# Altium PCB Gate_Driver.PcbDoc
Units mm, origin at the board's own origin, x right, y up, seen from the top; angles counter-clockwise.
Board outline 16.5 x 22 mm, 2 copper layers (Top Layer, Bottom Layer); 33 components, 28 nets, 108 pads, 5 vias.
Unrouted connection lines stored in the file: 45.
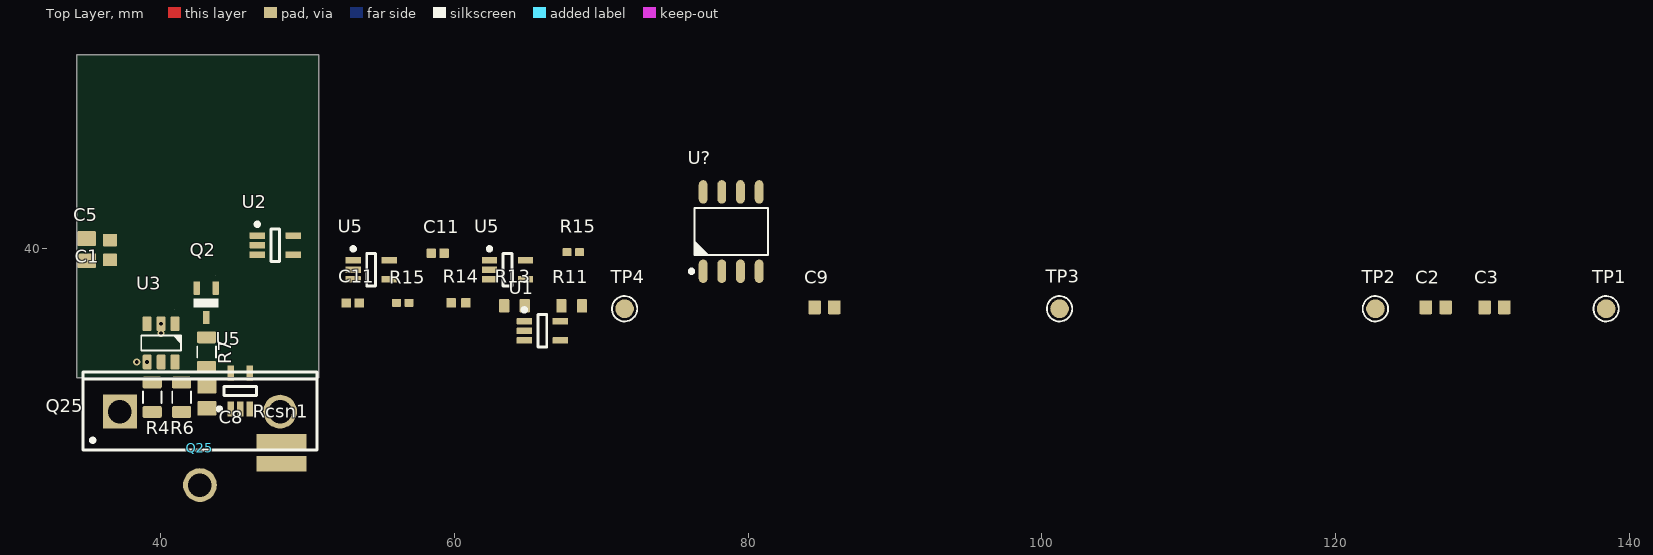
[diagram p0: Top Layer view]
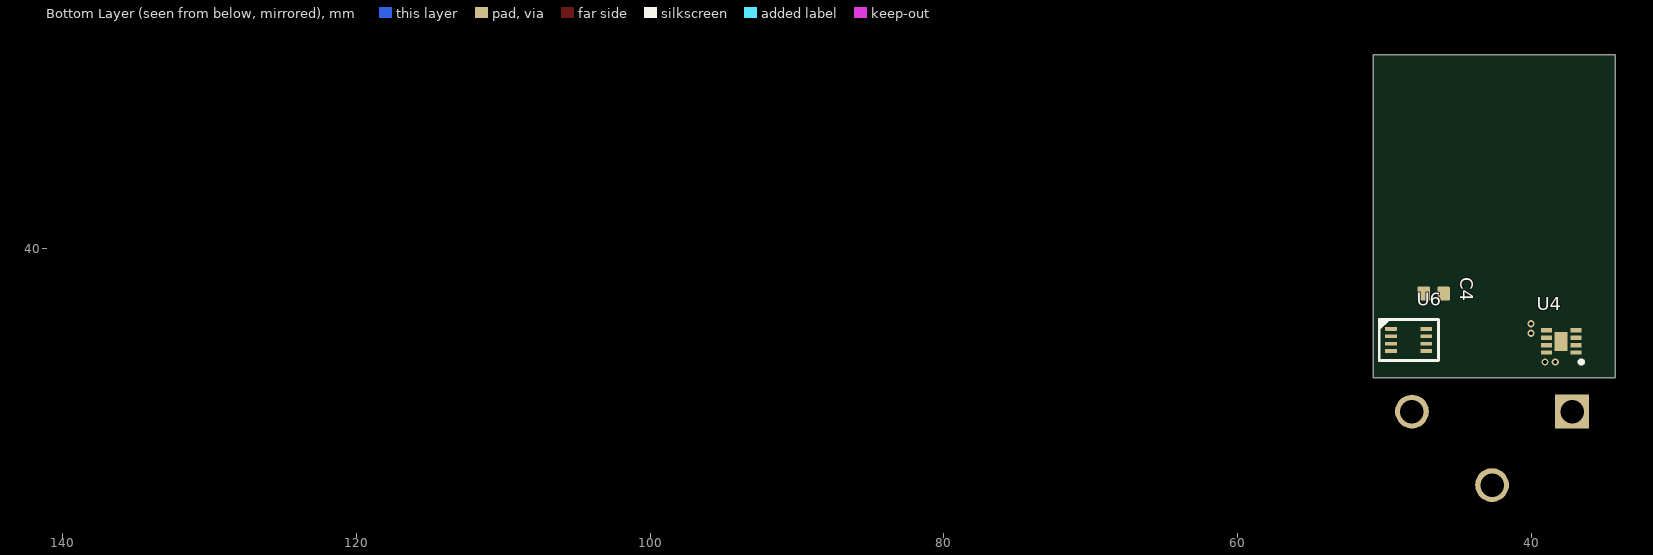
[diagram p1: Bottom Layer view, seen from below]

## Layer stack, top to bottom
Top Solder: solder mask 0.0102, Solder Resist, Dk 3.5
Top Layer: signal copper 0.0356
Dielectric 1: dielectric 0.32, FR-4, Dk 4.8
Bottom Layer: signal copper 0.0356
Bottom Solder: solder mask 0.0102, Solder Resist, Dk 3.5

## Board outline
34.3,31.2 34.3,53.2 50.8,53.2 50.8,31.2

## Design rules (kind name [scope] priority, off if disabled: settings)
Clearance [All] p1: gap=0.14 ignorepadtopadclearanceinfootprint=FALSE
PolygonConnect [All] p1: connectstyle=Relief reliefconductorwidth=0.254 reliefentries=4 polygonreliefangle="90 Angle" airgapwidth=0.254
RoutingVias [All] p1: holewidth=0.711 width=1.27 viastyle="Through Hole" minholewidth=0.711 minwidth=1.27 maxholewidth=0.711 maxwidth=1.27
SolderMaskExpansion [All] p1: expansion=0.102 istentingtop=FALSE
Width [All] p1: maxlimit=0.254 minlimit=0.254 preferedwidth=0.254
30 further rules are at their usual default settings.

## Components (designator, comment, footprint, x,y, rotation, side; value= is the part's Value field where it differs from the comment)
C1 "100nF" CAPC1608X90X35NL10T15 36.575,39.9 r270 top
C2 "100nF" CAPC1608X90X35NL10T15 126.8,36 r0 top
C3 "100nF" CAPC1608X90X35NL10T15 130.8,36 r0 top
C4 "100nF" CAPC1608X90X35NL10T15 46.675,36.925 r0 bottom
C5 "330nF" CAPC2013X135X45LL10T25 34.975,39.925 r270 top
C8 "330nF" CAPC2013X135X45LL10T25 43.175,29.875 r270 top
C9 "100nF" CAPC1608X90X35NL10T15 85.2,36 r0 top
C11 "100pF" CAPC1005X55X25NL05T10 58.878,39.677 r0 top
C11 "100pF" CAPC1005X55X25NL05T10 53.1,36.3 r0 top
Q2 "DMN3067LW-7" SOT323 43.125,36.3 r270 top
Q25 "C3M0065090D" TO-247 42.7,28.9 r0 top
R4 "4.7R" RESC2012X70N 39.45,29.875 r270 top value=N/A
R6 "1R" RESC2012X70N 41.45,29.875 r270 top value=N/A
R7 "6.2R" RESC2012X70N 43.15,32.95 r270 top value=N/A
R11 "330R" RESC1608X55X25NL10T15 68,36.1 r0 top
R13 "10K" RESC1608X55X25NL10T15 64.1,36.1 r0 top
R14 "33K" RESC1005X40X25ML05T05 60.3,36.3 r0 top
R15 "1K" RESC1005X40X25NL05T10 68.103,39.752 r0 top
R15 "1K" RESC1005X40X25NL05T10 56.5,36.3 r0 top
Rcsn1 "0.02R" RESC1632X80N 48.25,26.1 r90 top
TP1 "TESTPOINT" TP-R60 138.4,35.9 r0 top
TP2 "TESTPOINT" TP-R60 122.7,35.9 r0 top
TP3 "TESTPOINT" TP-R60 101.2,35.9 r0 top
TP4 "TESTPOINT" TP-R60 71.6,35.9 r0 top
U1 "74AHC1G08SE-7" DCK0005A_M 66,34.4 r0 top
U2 "SN74AHCT1G126DCKR" DCK0005A_M 47.825,40.225 r0 top
U3 "1EDN8550B" SOT23-6 40.05,33.575 r270 top
U4 "NCP5901BMNTBG" SON50P200X200X100-9N 38,33.675 r0 bottom
U5 "74AHC1G08SE-7" DCK0005A_M 63.628,38.552 r0 top
U5 "74AHC1G08SE-7" DCK0005A_M 54.353,38.552 r0 top
U5 "74AHC1G08SE-7" DCK0005A_M 45.45,30.3 r90 top
U6 "TC7W53FK" SSOP8-P-0.50A 48.375,33.775 r180 bottom
U? "LT1011" SOIC127P600X175-8AN 78.85,41.15 r90 top

## Footprints (in the part's own frame and the unit in brackets; to place one, negate y for a bottom-side part, rotate by r counter-clockwise, add the part's x,y. Pads: shape width x height; smd on the part's side, far side on the other; paste and mask are expansions set on the pad)
CAPC1005X55X25NL05T10 [mm]
  rrect15% 0.66x0.62 smd: 1(-0.44,0) 2(0.44,0)
  body extent -0.53,-0.28 0.53,0.27, height 0.55
CAPC1608X90X35NL10T15 [mm]
  rrect15% 0.85x0.95 smd: 1(-0.675,0) 2(0.675,0)
  body extent -0.85,-0.45 0.85,0.45, height 0.9
CAPC2013X135X45LL10T25 [mm]
  rrect15% 1x1.3 smd: 1(-0.75,0) 2(0.75,0)
  body extent -1.05,-0.67 1.05,0.68, height 1.35
DCK0005A_M [mm]
  rrect22% 1.05x0.45 smd: 1(-1.225,0.65) 2(-1.225,0) 3(-1.225,-0.65) 4(1.225,-0.65) 5(1.225,0.65)
  silkscreen extent -1.35,-1.1 0.3,1.55, body extent -1.14,-1 1.14,1, height 0.94
RESC1005X40X25ML05T05 [mm]
  rrect15% 0.65x0.65 smd: 1(-0.5,0) 2(0.5,0)
  body extent -0.53,-0.28 0.53,0.28, height 0.4
RESC1005X40X25NL05T10 [mm]
  rrect15% 0.6x0.55 smd: 1(-0.425,0) 2(0.425,0)
  body extent -0.53,-0.27 0.53,0.28, height 0.4
RESC1608X55X25NL10T15 [mm]
  rrect15% 0.7x0.9 smd: 1(-0.7,0) 2(0.7,0)
  body extent -0.85,-0.45 0.85,0.45, height 0.55
RESC1632X80N [mm]
  rect 1.05x3.4 smd: 1(-0.75,0) 2(0.75,0)
  body extent -0.8,-1.6 0.8,1.6, height 0.8
RESC2012X70N [mm] "Chip Resistor, Body 2.0x1.2mm, EIA 0805, IPC Medium Density"
  round 0.254 on Mech15: 0(0,0)
  rrect25% 0.8x1.3 smd: 1(-1,0) 2(1,0)
  Top Layer pour cut-out: -0.725,0.65 -0.525,0.85 0.525,0.85 0.725,0.65 0.725,-0.65 0.525,-0.85 -0.525,-0.85 -0.725,-0.65
  silkscreen extent -0.38,-0.64 0.38,0.63, body extent -1.1,-0.67 1.1,0.68, height 0.69
SOIC127P600X175-8AN [mm] "SOIC, 8-Leads, Body 4.9x3.9mm, Pitch 1.27mm, IPC Medium Density"
  round 1 on Mech15: 0(0,0)
  oval 1.6x0.6 smd: 1(-2.7,1.905) 2(-2.7,0.635) 3(-2.7,-0.635) 4(-2.7,-1.905) 5(2.7,-1.905) 6(2.7,-0.635) 7(2.7,0.635) 8(2.7,1.905)
  silkscreen extent -2.82,-2.5 1.6,2.82, body extent -3,-2.45 3,2.45, height 1.75
SON50P200X200X100-9N [mm]
  rect 0.75x0.3 smd: 1(-1,0.75) 2(-1,0.25) 3(-1,-0.25) 4(-1,-0.75) 5(1,-0.75) 6(1,-0.25) 7(1,0.25) 8(1,0.75)
  rect 0.9x1.3 smd: 9(0,0)
  silkscreen extent -1.5,1.28 -1.25,1.52, body extent -1.05,-1 1.05,1, height 1
SOT23-6 [mm]
  round 0.5 on Mech15: 0(0,0)
  rrect25% 1x0.6 smd: 1(-1.3,0.95) 2(-1.3,0) 3(-1.3,-0.95) 4(1.3,-0.95) 5(1.3,0) 6(1.3,0.95)
  silkscreen extent -0.51,-1.35 0.51,1.35, body extent -1.4,-1.45 1.4,1.45, height 1.44
SOT323 [mm] "Small outline 2.1mm L x 1.25mm W x 1.1mm H; 3 lead SC70, EIAJ SC-70, SOT323"
  round 0.5 on Mech15: 0(0,0)
  rrect20% 0.9x0.45 smd: 1(-1,0.65) 2(-1,-0.65) 3(1,0)
  silkscreen extent -0.3,-0.85 0.3,0.85, body extent -1.2,-1.1 1.2,1.1, height 1.1
SSOP8-P-0.50A [mm]
  rrect20% 0.8x0.254 smd: 1(-1.2,0.75) 2(-1.2,0.25) 3(-1.2,-0.25) 4(-1.2,-0.75) 5(1.2,-0.75) 6(1.2,-0.25) 7(1.2,0.25) 8(1.2,0.75)
  silkscreen extent -2.01,-1.4 2.02,1.4, body extent -1.05,-1 1.05,1, height 0.95
TO-247 [mm] "SIP with Mounting Hole; 3 Leads; Body 20 x 15.6 x 5 mm (typ); Pitch 5.45 mm"
  rect 2.3x2.3 hole 1.6: 1(-5.45,0)
  round 2.3 hole 1.6: 2(0,-5) 3(5.45,0)
  silkscreen extent -7.95,-2.6 7.95,2.7, body extent -7.95,-2.6 7.95,2.7, height 24.6
TP-R60 [mm]
  round 1.27 smd paste-1.27: 1(0,0)
  silkscreen extent -0.86,-0.86 0.86,0.86, body extent -0.76,-0.76 0.76,0.76, height 0.25

## Part data
C1 C2 C3 C4 C9: library part CAP, "X7R 100nF ±10% 50V 0603 Multilayer Ceramic Capacitors MLCC - SMD/SMT ROHS", Case Code (Imperial)=0603, Case Code (Metric)=1608, Dielectric=X7R, JLCPCB Part #=C14663, Manufacturer=Murata, Manufacturer Part Number=CC0603KRX7R9BB104, Max Operating Temperature=125°C, Min Operating Temperature=-55°C, Part Number=GCM188R72A104KA64D, Tolerance=10%, Voltage Rating=100V, Capacitance=100nF, Case/Package=0603, Category="Ceramic Capacitors", ComponentLink1Description=https://datasheet.ciiva.com/17451/product-17451047.pdf?src-supplier=Avnet+Europe, ComponentLink1URL=https://datasheet.ciiva.com/17451/product-17451047.pdf?src-supplier=Avnet+Europe, ComponentLink2Description=https://datasheet.ciiva.com/26889/getdatasheetpartid-387765-26889164.pdf?src-supplier=Verical, ComponentLink2URL=https://datasheet.ciiva.com/26889/getdatasheetpartid-387765-26889164.pdf?src-supplier=Verical, Depth=0.8mm, Height=0.8mm, Length=1.6mm, Mount="Surface Mount", Packaging="Tape and Reel", Radiation Hardening=No, RoHS=Yes, Supplier 1="Arrow Electronics", Supplier Part Number 1=GCM188R72A104KA64D, Termination=SMD/SMT, Voltage Rating (DC)=100V
C5 C8: library part CAP-NP-2, "X7R ±10% 50V 330nF 0805 Multilayer Ceramic Capacitors MLCC - SMD/SMT ROHS", Capacitance=100nF, Case Code (Imperial)=0805, Case Code (Metric)=2012, Dielectric=X7R, Dielectric Material=Ceramic, Insulation Resistance=10GR, JLCPCB Part #=C1740, Manufacturer=Murata, Manufacturer Part Number=GRM21BR71H104KA01L, Max Operating Temperature=125degC, Min Operating Temperature=-55degC, Package Description="2-Pin Surface Mount Device, Body 2 x 1.25 mm", Package Quantity=1, Supplier Part Number 1=2408531, Tolerance=10%, Voltage=50V, Case/Package=0805, Category="Ceramic Capacitors", ComponentLink1Description=https://datasheet.ciiva.com/11786/0900766b8003061f-11786305.pdf?src-supplier=RSComponents, ComponentLink1URL=https://datasheet.ciiva.com/11786/0900766b8003061f-11786305.pdf?src-supplier=RSComponents, ComponentLink2Description=https://datasheet.ciiva.com/20173/71-2024-20173169.pdf?src-supplier=Rapid+Electronics, ComponentLink2URL=https://datasheet.ciiva.com/20173/71-2024-20173169.pdf?src-supplier=Rapid+Electronics, ComponentLink3Description=https://datasheet.ciiva.com/29200/453120-da-01-en-vs-kondensator-0805-29200537.pdf?src-supplier=Conrad, ComponentLink3URL=https://datasheet.ciiva.com/29200/453120-da-01-en-vs-kondensator-0805-29200537.pdf?src-supplier=Conrad, ComponentLink4Description=https://datasheet.ciiva.com/132/partnumbering-e-01-132209.pdf?src-supplier=Digi-Key, ComponentLink4URL=https://datasheet.ciiva.com/132/partnumbering-e-01-132209.pdf?src-supplier=Digi-Key, ComponentLink5Description=https://datasheet.ciiva.com/132/partnumbering-e-01-132210.pdf?src-supplier=Digi-Key, ComponentLink5URL=https://datasheet.ciiva.com/132/partnumbering-e-01-132210.pdf?src-supplier=Digi-Key, ComponentLink6Description=https://datasheet.ciiva.com/132/partnumbering-e-01-132211.pdf?src-supplier=Digi-Key, ComponentLink6URL=https://datasheet.ciiva.com/132/partnumbering-e-01-132211.pdf?src-supplier=Digi-Key, ComponentLink7Description=https://datasheet.ciiva.com/7937/1794405-7937708.pdf?src-supplier=Element14, ComponentLink7URL=https://datasheet.ciiva.com/7937/1794405-7937708.pdf?src-supplier=Element14, ComponentLink8Description=https://datasheet.ciiva.com/7937/1794405-7937709.pdf?src-supplier=Element14, ComponentLink8URL=https://datasheet.ciiva.com/7937/1794405-7937709.pdf?src-supplier=Element14, ComponentLink9Description=https://datasheet.ciiva.com/28534/1769893-28534317.pdf?src-supplier=Element14, ComponentLink9URL=https://datasheet.ciiva.com/28534/1769893-28534317.pdf?src-supplier=Element14, ComponentLink10Description=https://datasheet.ciiva.com/7937/4360-7937710.pdf?src-supplier=Element14, ComponentLink10URL=https://datasheet.ciiva.com/7937/4360-7937710.pdf?src-supplier=Element14, Datasheet URL=http://psearch.en.murata.com/capacitor/product/GRM21BR71H104KA01%23.pdf, Datasheet Version=42675.0, Depth=1.25mm, Height=1.25mm, Lead Free=LeadFree, Length=2mm, Manufacturer URL=http://www.murata.com/, Material=Ceramic, Mount=SurfaceMount, Number of Pins=2, Package Reference=0805, Packaging=TapeandReel, Radiation Hardening=No, REACH SVHC=Unknown, RoHS=Yes, RoHSCompliant=true, Stock 1=576000, Supplier 1=Farnell, Termination=SMD/SMT, Thickness=0.053inch, Voltage Rating=50V, Voltage Rating (DC)=50V, Width=0.049inch
C11 C11: library part CMP-2008-04245-1, "C0G ±5% 50V 100pF 0402 Multilayer Ceramic Capacitors MLCC - SMD/SMT ROHS", Capacitance=10pF, Case Code (Imperial)=0402, Case Code (Metric)=1005, Dielectric=C0G, JLCPCB Part #=C1546, Manufacturer=Murata, Manufacturer Part Number=GRM1555C1H100JA01D, Max Operating Temperature=125°C, Min Operating Temperature=-55°C, Package Quantity=10000, Supplier Part Number 1=490-5921-1-ND, Temperature coefficient=30ppm/°C, Tolerance=5%, Voltage=50V, Case/Package=0402, Category="Ceramic Capacitors", ComponentLink1Description=https://datasheet.ciiva.com/2989/product-2989280.pdf?src-supplier=Avnet, ComponentLink1URL=https://datasheet.ciiva.com/2989/product-2989280.pdf?src-supplier=Avnet, ComponentLink2Description=https://datasheet.ciiva.com/18184/getdatasheetpartid-307234-18184164.pdf?src-supplier=Verical, ComponentLink2URL=https://datasheet.ciiva.com/18184/getdatasheetpartid-307234-18184164.pdf?src-supplier=Verical, ComponentLink3Description=https://datasheet.ciiva.com/29200/453545-da-01-en-vs-kondensator-0402-29200107.pdf?src-supplier=Conrad, ComponentLink3URL=https://datasheet.ciiva.com/29200/453545-da-01-en-vs-kondensator-0402-29200107.pdf?src-supplier=Conrad, ComponentLink4Description=https://datasheet.ciiva.com/6271/partnumbering-e-01-6271158.pdf?src-supplier=Digi-Key, ComponentLink4URL=https://datasheet.ciiva.com/6271/partnumbering-e-01-6271158.pdf?src-supplier=Digi-Key, ComponentLink5Description=https://datasheet.ciiva.com/48671/product-48671350.pdf?src-supplier=Avnet, ComponentLink5URL=https://datasheet.ciiva.com/48671/product-48671350.pdf?src-supplier=Avnet, ComponentLink6Description=https://datasheet.ciiva.com/6271/partnumbering-e-01-6271159.pdf?src-supplier=Digi-Key, ComponentLink6URL=https://datasheet.ciiva.com/6271/partnumbering-e-01-6271159.pdf?src-supplier=Digi-Key, ComponentLink7Description=https://datasheet.ciiva.com/6271/partnumbering-e-01-6271068.pdf?src-supplier=Digi-Key, ComponentLink7URL=https://datasheet.ciiva.com/6271/partnumbering-e-01-6271068.pdf?src-supplier=Digi-Key, ComponentLink8Description=https://datasheet.ciiva.com/7828/1666664-7828812.pdf?src-supplier=Element14, ComponentLink8URL=https://datasheet.ciiva.com/7828/1666664-7828812.pdf?src-supplier=Element14, Construction=Flat, Depth=0.5mm, Height=0.5mm, Lead Free="Lead Free", Length=1mm, Material=Ceramic, Mount="Surface Mount", Number of Pins=2, Packaging="Tape and Reel", Part Number=GRM1555C1H100JA01D, Pricing 1="1=0.10000, 10=0.01900, 50=0.01060, 100=0.00860, 500=0.00616, 1000=0.00484, 2500=0.00440, 5000=0.00405 (USD)", Radiation Hardening=No, REACH SVHC="No SVHC", RoHS=Yes, RoHS Compliant=Yes, Series=GRM, Stock 1=1896512, Supplier 1=Digi-Key, Termination=SMD/SMT, Thickness=0.022inch, Voltage Rating=50V, Voltage Rating (DC)=50V, Width=0.02inch
Q2: library part 381a366367e4312d0f7d2747150cb42, "MOSFET N-CH 60V 115MA SOT323", Case/Package=SOT-323, Continuous Drain Current (ID)=115mA, Drain to Source Breakdown Voltage=70V, Drain to Source Resistance=2.6R, Drain to Source Voltage (Vdss)=60V, Gate to Source Voltage (Vgs)=20V, Input Capacitance=50pF, Max Operating Temperature=150°C, Max Power Dissipation=200mW, Min Operating Temperature=-55°C, On-State Resistance=7.5R, Package Quantity=1, Threshold Voltage=2V, Contact Plating=Tin, Current Rating=115mA, Dual Supply Voltage=60V, Element Configuration=Single, Height=1mm, Lead Free="Lead Free", Length=2.2mm, Mount="Surface Mount", Nominal Vgs=2V, Number of Channels=1, Number of Elements=1, Number of Pins=3, Packaging="Tape and Reel", Power Dissipation=200mW, Radiation Hardening=No, Rds On Max=7.5R, REACH SVHC="No SVHC", Termination=SMD/SMT, Turn-Off Delay Time=11ns, Turn-On Delay Time=7ns, Voltage Rating (DC)=60V, Weight=0.000212oz, Width=1.35mm
Q25: library part NEMOS-GDS-3, "Silicon Carbide Power MOSFET C2M(TM) MOSFET Technology, 1200 V, 90 A, -55 to 150 degC, 3-Pin TO-247, RoHS, Tube", Id - Continuous Drain Current=90A, Manufacturer=Cree,Inc., Maximum Operating Temperature=+150C, Minimum Operating Temperature=-55C, Package / Case=TO-247-3, Package Description="3-Pin Flange Mount, Vertical Straight Lead, Body 15.94 x 5.02 mm, Pitch 5.44 mm", Pd - Power Dissipation=463W, Rds On - Drain-Source Resistance=25mOhms, Vds - Drain-Source Breakdown Voltage=1200V, Vgs - Gate-Source Voltage=-10V,+25V, Vgs th - Gate-Source Threshold Voltage=2.4V, Brand=Cree,Inc., Channel Mode=Enhancement, Configuration=Single, Datasheet URL=http://www.wolfspeed.com/media/downloads/161/C2M0025120D.pdf, Datasheet Version="Rev. B, 10/2015", Factory Pack Quantity=30, Fall Time=28.4ns, Forward Transconductance - Min=23.6S, Height=21.1mm, Id=90A, Length=5.21mm, Manufacturer URL=http://www.cree.com/, Mounting Style=ThroughHole, Mounting Technology=ThroughHole, Number of Channels=1Channel, Package Reference=TO-247-3, Packaging=Tube, Product=PowerMOSFET, Product Category=MOSFET, Qg - Gate Charge=406nC, RDS(on)=0.025Ohm, Rise Time=31.6ns, RoHS=True, Technology=SiC, Transistor Polarity=N-Channel, Transistor Type=1N-Channel, Trr=32ns, Type=SiliconCarbidePowerMOSFET, Typical Turn-Off Delay Time=28.8ns, Typical Turn-On Delay Time=14.4ns, Unit Weight=1.340411oz, Vdss=1200V, Vgss=20V, Vth=2.6V, Width=16.13mm
R4: library part RES_EMPTY_0805, "4.7Ω ±1% ±400ppm/℃ 0.125W 0805 Chip Resistor - Surface Mount ROHS", JLCPCB Part #=C17675, Package / Case="0805 (2012 metric)"
R6: library part RES_EMPTY_0805, "±1% 1Ω ±400ppm/℃ 0.125W 0805 Chip Resistor - Surface Mount ROHS", JLCPCB Part #=C25271, Package / Case="0805 (2012 metric)"
R7: library part RES_EMPTY_0805, "Resistor, 0805 SMD, Empty footprint", Package / Case="0805 (2012 metric)"
R11: library part RES-2, "±1% 330Ω ±100ppm/℃ 0.1W 0603 Chip Resistor - Surface Mount ROHS", Capacitance="47 uF", Case Code (Imperial)=2917, Case Code (Metric)=7343, JLCPCB Part #=C23138, Manufacturer=Yageo, Manufacturer Part Number=RC0603FR-07330RL, Max Operating Temperature=125degC, Max Power Dissipation=100mW, Min Operating Temperature=-55degC, Package Quantity=500, Supplier Part Number 1=311-330HRCT-ND, Temperature coefficient=100ppm/°C, Tolerance=10%, Voltage Rating="16 V", Case/Package=2917, Category="Chip SMD Resistors", ComponentLink1Description="Manufacturer URL", ComponentLink1URL=http://www.yageo.com/, ComponentLink2Description=Datasheet, ComponentLink2URL=http://www.yageo.com/documents/recent/PYu-RC_Group_51_RoHS_L_04.pdf, ComponentLink3Description=https://datasheet.ciiva.com/11819/0900766b80f96399-11819327.pdf?src-supplier=RSComponents, ComponentLink3URL=https://datasheet.ciiva.com/11819/0900766b80f96399-11819327.pdf?src-supplier=RSComponents, ComponentLink4Description=https://datasheet.ciiva.com/2454/pyu-r-int-thick-7-2454864.pdf?src-supplier=Digi-Key, ComponentLink4URL=https://datasheet.ciiva.com/2454/pyu-r-int-thick-7-2454864.pdf?src-supplier=Digi-Key, ComponentLink5Description=https://datasheet.ciiva.com/2454/pyu-r-int-thick-7-2454865.pdf?src-supplier=Digi-Key, ComponentLink5URL=https://datasheet.ciiva.com/2454/pyu-r-int-thick-7-2454865.pdf?src-supplier=Digi-Key, ComponentLink6Description=https://datasheet.ciiva.com/2454/pyu-r-int-thick-7-2454866.pdf?src-supplier=Digi-Key, ComponentLink6URL=https://datasheet.ciiva.com/2454/pyu-r-int-thick-7-2454866.pdf?src-supplier=Digi-Key, ComponentLink7Description=https://datasheet.ciiva.com/12555/rc0603-272842-12555334.pdf?src-supplier=Mouser, ComponentLink7URL=https://datasheet.ciiva.com/12555/rc0603-272842-12555334.pdf?src-supplier=Mouser, ComponentLink8Description=https://datasheet.ciiva.com/46440/1868787-46440904.pdf?src-supplier=Element14, ComponentLink8URL=https://datasheet.ciiva.com/46440/1868787-46440904.pdf?src-supplier=Element14, ComponentLink9Description=https://datasheet.ciiva.com/7746/443971-7746329.pdf?src-supplier=Element14, ComponentLink9URL=https://datasheet.ciiva.com/7746/443971-7746329.pdf?src-supplier=Element14, ComponentLink10Description=https://datasheet.ciiva.com/7746/443971-7746330.pdf?src-supplier=Element14, ComponentLink10URL=https://datasheet.ciiva.com/7746/443971-7746330.pdf?src-supplier=Element14, ComponentLink11Description=https://datasheet.ciiva.com/7746/1686128-7746331.pdf?src-supplier=Element14, ComponentLink11URL=https://datasheet.ciiva.com/7746/1686128-7746331.pdf?src-supplier=Element14, Composition="Thick Film", DatasheetVersion="Rev. 4, 02/2016", Depth=0.8mm, ESR="800 mohm", Features="Moisture Resistant", Height="3.1 mm", Lead Free="Lead Free", Length="7.3 mm", Mount="Surface Mount", Number of Pins=2, Number of Terminations=2, PackageDescription="2-Pin Surface Mount Device, Body 1.6 x 0.8 mm", PackageReference=0603, Packaging="Tape and Reel", Pins=2, Power Rating=100mW, Pricing 1="1=0.10000, 10=0.02300, 100=0.00940, 1000=0.00421, 2500=0.00366 (USD)", Radiation Hardening=No, REACH SVHC="No SVHC", Resistance=330R, RoHS=Yes, RoHSCompliant=True, Stock 1=4209654, Supplier 1=Digi-Key, Termination=SMD/SMT, Voltage Rating (DC)="16 V", Width="4.3 mm"
R13: library part RES-2, "±1% ±100ppm/℃ 10kΩ 0.1W 0603 Chip Resistor - Surface Mount ROHS", Case Code (Imperial)=0603, Case Code (Metric)=1608, JLCPCB Part #=C25804, Manufacturer=Yageo, Manufacturer Part Number=RC0603JR-071ML, Max Operating Temperature=155°C, Min Operating Temperature=-55°C, Package Description="2-Pin Surface Mount Device, Body 1.6 x 0.8 mm", Package Quantity=5000, Power Rating=100mW, Resistance=1Mohm, Resistance Tolerance=±5%, Resistor Case Style=0603[1608Metric], Resistor Element Type=ThickFilm, Supplier Part Number 1=311-1.0MGRCT-ND, Temperature coefficient=±100ppm/°C, Tolerance=5%, Voltage Rating=50V, Automotive Qualification Standard=-, Case/Package=0603, ComponentLink1Description=https://datasheet.ciiva.com/46395/443971-46395067.pdf?src-supplier=Element14, ComponentLink1URL=https://datasheet.ciiva.com/46395/443971-46395067.pdf?src-supplier=Element14, ComponentLink2Description=https://datasheet.ciiva.com/8883/pyu-rc0603-51-rohs-l-4-8883053.pdf?src-supplier=Avnet, ComponentLink2URL=https://datasheet.ciiva.com/8883/pyu-rc0603-51-rohs-l-4-8883053.pdf?src-supplier=Avnet, ComponentLink3Description=https://datasheet.ciiva.com/12555/rc0603-272842-12555342.pdf?src-supplier=Mouser, ComponentLink3URL=https://datasheet.ciiva.com/12555/rc0603-272842-12555342.pdf?src-supplier=Mouser, ComponentLink4Description=https://datasheet.ciiva.com/7746/443971-7746463.pdf?src-supplier=Element14, ComponentLink4URL=https://datasheet.ciiva.com/7746/443971-7746463.pdf?src-supplier=Element14, Composition="Thick Film", Contact Plating=Tin,Matte, Datasheet URL=http://www.yageo.com/documents/recent/PYu-RC_Group_51_RoHS_L_7.pdf, Datasheet Version="Rev. 7, 05/2017", Depth=0.8mm, Height=0.45mm, Lead Free="Lead Free", Length=1.6mm, Manufacturer URL=http://www.yageo.com/, Military Standard=Not, Mounting Technology=SurfaceMount, MSL=MSL1-Unlimited, Number of Pins=2, Package Reference=0603, Packaging=CutTape, Pricing 1="1=0,10000, 10=0,01900, 100=0,00770, 1000=0,00347, 2500=0,00301 (USD)", Product Range=RCSeries, Radiation Hardening=No, REACH SVHC="No SVHC", RoHS=Yes, Stock 1=3949362, Supplier 1=Digi-Key, SVHC=ToBeAdvised, Termination=SMD/SMT, Voltage Rating (DC)=50V, Width=0.8mm
R14: library part RES, "S, THICK FILM, 33K, 100mW, 1%, 0402, FULL REEL; Product Range:PANASONIC - ERJ Series; Resistance:33kohm; Power Rating:100mW; Resistance Tolerance:± 1%; Resistor Case Style:0402 ^1005 Metric]; Resistor Element Type:Thick Film", Case Code (Imperial)=0402, Case Code (Metric)=1005, Manufacturer=Panasonic, Manufacturer Part Number=ERJ-2RKF3302X, Max Operating Temperature=155°C, Max Power Dissipation=100mW, Min Operating Temperature=-55°C, Package Quantity=1, Part Number=ERJ2RKF3302X, Resistance=33kR, Resistor Type="Thick Film", Supplier Part Number 1=P33.0KLCT-ND, Temperature coefficient=100ppm/°C, Tolerance=1%, Voltage Rating=50V, Case/Package=0402, Category="Chip SMD Resistors", ComponentLink1Description=https://datasheet.ciiva.com/11821/0900766b80f80784-11821294.pdf?src-supplier=RSComponents, ComponentLink1URL=https://datasheet.ciiva.com/11821/0900766b80f80784-11821294.pdf?src-supplier=RSComponents, ComponentLink2Description=https://datasheet.ciiva.com/16784/70260748-16784773.pdf?src-supplier=Allied+Electronics, ComponentLink2URL=https://datasheet.ciiva.com/16784/70260748-16784773.pdf?src-supplier=Allied+Electronics, ComponentLink3Description=https://datasheet.ciiva.com/22673/1678782-22673685.pdf?src-supplier=Element14, ComponentLink3URL=https://datasheet.ciiva.com/22673/1678782-22673685.pdf?src-supplier=Element14, ComponentLink4Description=https://datasheet.ciiva.com/22737/426256-22737285.pdf?src-supplier=Element14, ComponentLink4URL=https://datasheet.ciiva.com/22737/426256-22737285.pdf?src-supplier=Element14, ComponentLink5Description=https://datasheet.ciiva.com/30159/aoa0000ce2-30159014.pdf?src-supplier=Onlinecomponents.com, ComponentLink5URL=https://datasheet.ciiva.com/30159/aoa0000ce2-30159014.pdf?src-supplier=Onlinecomponents.com, ComponentLink6Description=https://datasheet.ciiva.com/9190/aoa0000ce2-9190679.pdf?src-supplier=Avnet, ComponentLink6URL=https://datasheet.ciiva.com/9190/aoa0000ce2-9190679.pdf?src-supplier=Avnet, ComponentLink7Description=https://datasheet.ciiva.com/17210/aoa0000ce2-17210312.pdf?src-supplier=Avnet+Europe, ComponentLink7URL=https://datasheet.ciiva.com/17210/aoa0000ce2-17210312.pdf?src-supplier=Avnet+Europe, ComponentLink8Description=https://datasheet.ciiva.com/7802/aoa0000ce2-7802409.pdf?src-supplier=Element14, ComponentLink8URL=https://datasheet.ciiva.com/7802/aoa0000ce2-7802409.pdf?src-supplier=Element14, ComponentLink9Description=https://datasheet.ciiva.com/46420/1678782-46420317.pdf?src-supplier=Element14, ComponentLink9URL=https://datasheet.ciiva.com/46420/1678782-46420317.pdf?src-supplier=Element14, ComponentLink10Description=https://datasheet.ciiva.com/24024/aoa0000ce2-24024398.pdf?src-supplier=Mouser, ComponentLink10URL=https://datasheet.ciiva.com/24024/aoa0000ce2-24024398.pdf?src-supplier=Mouser, ComponentLink11Description=https://datasheet.ciiva.com/22687/1678782-22687071.pdf?src-supplier=Element14, ComponentLink11URL=https://datasheet.ciiva.com/22687/1678782-22687071.pdf?src-supplier=Element14, Contact Plating=Tin, Depth=0.5mm, Features="Automotive AEC-Q200", Height=0.35mm, Lead Free="Lead Free", Length=1mm, Military Standard=Not, Mount="Surface Mount", Number of Pins=2, Number of Terminations=2, Packaging="Tape and Reel", Power Rating=100mW, Pricing 1="1=0.10000, 10=0.02500, 100=0.01020, 1000=0.00457, 2500=0.00397, 5000=0.00328 (USD)", Radiation Hardening=No, REACH SVHC="No SVHC", RoHS=Yes, Stock 1=8872, Supplier 1=Digi-Key, Termination=SMD/SMT, Voltage Rating (DC)=50V, Width=0.02inch
R15 R15: library part CMP-2002-07472-1, "±1% 1/16W ±100ppm/℃ 1kΩ 0402 Chip Resistor - Surface Mount ROHS", Case Code (Imperial)=0402, Case Code (Metric)=1005, JLCPCB Part #=C11702, Manufacturer="Yageo / Phycomp", Manufacturer Part Number=RC0402FR-071KL, Max Operating Temperature=155°C, Max Power Dissipation=63mW, Min Operating Temperature=-55°C, Power Rating=62.5mW, Resistance=1kR, Resistance Tolerance=1%, Resistor Type="Thick Film", Supplier Part Number 1=311-1.00KLRCT-ND, Temperature coefficient=100ppm/°C, Voltage Rating=50V, Case/Package=0402, Category="Chip SMD Resistors", ComponentLink1Description=https://datasheet.ciiva.com/11819/0900766b80c66297-11819477.pdf?src-supplier=RSComponents, ComponentLink1URL=https://datasheet.ciiva.com/11819/0900766b80c66297-11819477.pdf?src-supplier=RSComponents, ComponentLink2Description=https://datasheet.ciiva.com/12666/pyu-rc0402-51-rohs-l-6-r-12666741.pdf?src-supplier=Mouser, ComponentLink2URL=https://datasheet.ciiva.com/12666/pyu-rc0402-51-rohs-l-6-r-12666741.pdf?src-supplier=Mouser, ComponentLink3Description=https://datasheet.ciiva.com/17063/pyu-rc0402-51-rohs-l-6-r-17063193.pdf?src-supplier=Future+Electronics, ComponentLink3URL=https://datasheet.ciiva.com/17063/pyu-rc0402-51-rohs-l-6-r-17063193.pdf?src-supplier=Future+Electronics, ComponentLink4Description=https://datasheet.ciiva.com/22747/1018594-22747513.pdf?src-supplier=Element14, ComponentLink4URL=https://datasheet.ciiva.com/22747/1018594-22747513.pdf?src-supplier=Element14, ComponentLink5Description=https://datasheet.ciiva.com/7849/1018594-7849869.pdf?src-supplier=Element14, ComponentLink5URL=https://datasheet.ciiva.com/7849/1018594-7849869.pdf?src-supplier=Element14, ComponentLink6Description=https://datasheet.ciiva.com/7983/1018594-7983502.pdf?src-supplier=Element14, ComponentLink6URL=https://datasheet.ciiva.com/7983/1018594-7983502.pdf?src-supplier=Element14, ComponentLink7Description=https://datasheet.ciiva.com/7849/1018594-7849871.pdf?src-supplier=Element14, ComponentLink7URL=https://datasheet.ciiva.com/7849/1018594-7849871.pdf?src-supplier=Element14, Construction=Rectangular, Depth=0.5mm, Features="Moisture Resistant", Height=0.32mm, Lead Free="Lead Free", Length=1mm, Military Standard=Not, Number of Pins=2, Number of Terminations=2, Packaging="Tape and Reel", Part Number=RC0402FR-071KL, Pricing 1="1=0.10000, 10=0.01600, 100=0.00660, 1000=0.00299, 2500=0.00259, 5000=0.00214 (USD)", REACH SVHC=Unknown, RoHS=Yes, RoHS Compliant=Yes, Series=RC, Size Code=0402, Stock 1=21620273, Supplier 1=Digi-Key, Technology="THICK FILM", Termination=SMD/SMT, Tolerance=1%, Voltage Rating (DC)=50V, Width=0.5mm
Rcsn1: library part FCSL32R010FER, "Resistors FCSL Series Metal Foil Power Rating 1.5W Tape Reel Resistance 20 mOhms", Manufacturer=Ohmite, Manufacturer Part Number=FCSL32R020FER, Mouser Part Number=588-FCSL32R020FER, Supplier Part Number 1=FCSL32R020FERCT-ND, Category="Chip SMD Resistors", ComponentLink1Description=http://www.farnell.com/datasheets/2645666.pdf?src-supplier=Farnell, ComponentLink1URL=http://www.farnell.com/datasheets/2645666.pdf?src-supplier=Farnell, Datasheet Link=https://www.mouser.com/datasheet/2/303/res_fcsl-1265567.pdf, Height=0.8mm, Manufacturer_Name=Ohmite, Manufacturer_Part_Number=FCSL32R020FER, Mouser Price/Stock=https://www.mouser.co.uk/ProductDetail/Ohmite/FCSL32R010FER?qs=y6ZabgHbY%252Bzyqz46BACxrg%3D%3D, Pricing 1="1=0.63000, 10=0.45000, 25=0.35120, 50=0.29700, 100=0.23400, 250=0.19800, 500=0.16200, 1000=0.12600 (USD)", RoHS=Yes, Stock 1=1940, Supplier 1=Digi-Key
TP1 TP2 TP3 TP4: "SMD test pin"
U1 U5 U5 U5: library part TI-SN74XXX1X08-5, "Single 2-Input Positive-AND Gate, DCK0005A, SMALL T&R", F @ Nom Voltage(Max)(Mhz)=75, Generic Part Number=SN74AHC1G08, ICC @ Nom Voltage(Max)(mA)=0.01, Manufacturer="Texas Instruments", Operating Temperature Range(C)="-55 to 125", Rating=Catalog, tpd @ Nom Voltage(Max)(ns)=12.3,7.9, Voltage(Nom)(V)=3.3,5, 3-State Output=No, Bits(#)=1, DatasheetVersion=SCLS314N, Gate Type=AND, Input Type=CMOS, Logic=True, Output Drive (IOL/IOH)(Max)(mA)=50/-50, Output Type=CMOS, PackageReference=DCK0005A, Schmitt Trigger=No, Sub-Family="AND Gate", Technology Family=AHC, VCC(Max)(V)=5.5, VCC(Min)(V)=2
U2: library part TI-SN74XXXXXX126-5, "Single Bus Buffer Gate With 3-State Output, DCK0005A, LARGE T&R", F @ Nom Voltage(Max)(Mhz)=75, Generic Part Number=SN74AHCT1G126, ICC @ Nom Voltage(Max)(mA)=0.01, Manufacturer="Texas Instruments", Operating Temperature Range(C)="-40 to 125", Rating=Catalog, tpd @ Nom Voltage(Max)(ns)=6, Voltage(Nom)(V)=5, 3-State Output=Yes, Bits(#)=1, DatasheetVersion=SCLS380J, Input Type=CMOS, Logic=True, Output Drive (IOL/IOH)(Max)(mA)=8/-8, Output Type=CMOS, PackageReference=DCK0005A, Schmitt Trigger=No, Sub-Family="Non-Inverting Buffer/Driver", Technology Family=AHCT, VCC(Max)(V)=5.5, VCC(Min)(V)=2
U3: "Single-channel EiceDRIVER™ with true  differential inputs"
U4: "Integrated Circuit", Manufacturer_Name="ON Semiconductor", Mouser Part Number=863-NCP5901BMNTBG, Arrow Part Number=NCP5901BMNTBG, Arrow Price/Stock=https://www.arrow.com/en/products/ncp5901bmntbg/on-semiconductor, Datasheet Link=http://www.onsemi.com/pub/Collateral/NCP5901B-D.PDF, Height=1mm, Manufacturer_Part_Number=NCP5901BMNTBG, Mouser Price/Stock=https://www.mouser.co.uk/ProductDetail/ON-Semiconductor/NCP5901BMNTBG?qs=UikTwjRNStJje%252BaGWM%2F5BQ%3D%3D
U6: "2-Channel Multiplexer/Demultiplexer"
U?: library part IC_Comparator_LT1011, "IC SMD Voltage Comparator SOIC-8", Manufacturer 1="Linear Technology", Manufacturer Part Number 1=LT1011CS8#PBF, Package / Case="8-SOIC (0.154\", 3.90mm Width)", Supplier Part Number 1=LT1011CS8#PBF-ND, Voltage - Supply="2.7 V ~ 16 V, ±1.35 V ~ 8 V", SCDType=undef, Supplier 1=Digi-Key

## Via types
v1: diameter 0.5, hole 0.25, Top Layer to Bottom Layer, tented both sides, 5 vias

## Nets (pads, with @x,y where several pads share a name; then routed paths per layer and width w, separated by ;. In a path a pad name is that pad's centre, name@x,y a point inside that pad or via, vN(x,y) a via of type N, cw(c..) or ccw(c..) an arc to the next point about the centre after c; other vN are vias at no path point)
BOTT_GND: C1.1 C2.1 C3.1 C4.2 C9.2 C11.1 R14.2 TP2.1 U1.3 U2.3 U4.4
DRV_LF_MOS_BOTT: 
NetC6_2: U1.2
NetC7_2: U1.1
NetC8_1: C8.1 R7.2
NetC8_2: C8.2 Q25.1 R4.2 R6.2
NetC11_2: C11.2@53.54,36.3 R15.1@56.075,36.3 U5.1@62.403,39.202
NetQ2_1: Q2.1 TP4.1
NetQ2_2: Q2.2 Rcsn1.1 U?.4
NetQ2_3: Q2.3 R7.1
NetQ25_3: Q25.3 Rcsn1.2 U?.2
NetR2_1: U1.4
NetR2_2: U3.3
NetR4_1: R4.1 U3.5 U5.2@53.128,38.552
NetR5_2: U3.1
NetR6_1: R6.1 U3.6 U5.2@45.45,29.075
NetR11_1: R11.1 U4.3
NetR11_2: R11.2
NetR13_2: R13.2 U4.2
NetR15_2: R15.2@56.925,36.3 U5.2@62.403,38.552 U5.4@55.578,37.902
NetU3_2: U3.2 U4.5
  other v1: 40.05,34.225 40.05,34.875
NetU3_4: U3.4 U4.8
  other v1: 38.4,32.275 39.1,32.275 39.1,32.275
NetU5_1: U5.1@44.8,29.075 U5.1@53.128,39.202 U?.7
OC_OUT_BOTT: 
TWO_LEVEL_OC: 
V_3V3D: C2.2 C3.2 U1.5 U2.5
V_3VN: C4.1 C5.1 C9.1 R13.1 TP3.1 U4.6 U4.9
V_16VP: TP1.1
pads on no net: C1.2 C5.2 C11.2@59.318,39.677 Q2.0 Q25.2 R4.0 R6.0 R7.0 R14.1 R15.1@67.678,39.752 R15.2@68.528,39.752 U2.1 U2.2 U2.4 U3.0 U4.1 U4.7 U5.3 U5.4@46.1,31.525 U5.4@64.853,37.902 U5.5 U6.1 U6.2 U6.3 U6.4 U6.5 U6.6 U6.7 U6.8 U?.0 U?.1 U?.3 U?.5 U?.6 U?.8

## Silkscreen, mask and mechanical layers (free items; w line width, h text height)
Mechanical 1:
  lines w0.2: 34.25,31.2 50.75,31.2 50.75,53.2 34.25,53.2 34.25,31.2